# EAGLE board PCB1 v21 (EAGLE 9.7.0)

Size 58.4 x 25.07 mm. Coordinates in mm from the lower left corner, seen from the top.
Outline: 0,0 58.4,0 58.4,25.07 0,25.07 0,0
Copper layers (1*16): Top / Bottom
Stack-up Default Layer Stack: Top CuFoil:007 0.035mm / Dielectric-1 FR-4 0.2mm / Bottom CuFoil:007 0.035mm
Design rules: minimum copper width 6mil, minimum drill size 0.35mm, copper clearance wire_polygon to wire_polygon 6mil, copper clearance wire_polygon to pad_smd 6mil, copper clearance wire_polygon to via 6mil, copper clearance pad_smd to pad_smd 6mil, copper clearance pad_smd to via 6mil, copper clearance via to via 6mil, copper clearance smd to pad (same net) 6mil, copper clearance smd to via (same net) 6mil, copper clearance smd to smd (same net) 6mil, dimension clearance 40mil, via restrict clearance 0mil, restrict clearance 0mil, solder-mask clearance 0mil, drill distance 6mil, keepout clearance 0mil

## Footprints (pad centres in the part's own frame; a part is rotated, then mirrored left to right if it is on the bottom)
CAPC2012X110 = smd 1.165 x 1.465: 1 -0.875,0; 2 0.875,0
CAPAE430X610N = smd 2.6 x 1.8: 1 -2.25,0; 2 2.25,0
CAPPRD350W65D800H2000 = drill 0.85 pad 1.275 square: 1 0,0 | drill 0.85 pad 1.275: 2 3.5,0
LEDC1005X25N_FLAT-B = smd 0.7 x 0.5: A 0.45,0; C -0.45,0
VEMD2023X01 = smd 1.35 x 0.75: 1 -1.9,0; 2 1.9,0
SOD2513X115N = smd 1.05 x 0.5: 1 -1.138,0; 2 1.138,0
LC86LICMD = smd 2.5 x 1: 1 7.75,-6.35; 2 7.75,-3.81; 3 7.75,-1.27; 4 7.75,1.27; 5 7.75,3.81; 6 7.75,6.35; 7 -7.75,6.35; 8 -7.75,3.81; 9 -7.75,1.27; 10 -7.75,-1.27; 11 -7.75,-3.81; 12 -7.75,-6.35
SOP254P675X240-4N = smd 1.75 x 0.65: 1 -3.075,1.27; 2 -3.075,-1.27; 3 3.075,-1.27; 4 3.075,1.27
ACS1088SPTR = smd 0.9 x 2: 1 -2.3,-2.95; 2 2.3,-2.95 | smd 3.2 x 2: 3 0,2.95
HAL1503UAA = drill 0.76 pad 1.2: 1 0,0; 2 2.54,0; 3 5.08,0
2468 = drill 1.02 pad 1.53: 1 23.625,-6.35; 2 23.625,6.35 | hole 3.45: -14.985,2.35; 14.985,-2.35
1_05X2MM = drill 1.016 pad 1.3 square: 1 -4,0 | drill 1.016 pad 1.3: 2 -2,0; 3 0,0; 4 2,0; 5 4,0
1X04 = drill 1.016 long: 1 -3.81,0; 2 -1.27,0; 3 1.27,0; 4 3.81,0
1X01 = drill 1.016 octagon: 1 0,0
DMG1029SVQ7 = smd 0.3 x 0.67: 1 -0.5,-0.635; 2 0,-0.635; 3 0.5,-0.635; 4 0.5,0.635; 5 0,0.635; 6 -0.5,0.635
RESC2012X65 = smd 1.031 x 1.42: 1 -0.919,0; 2 0.919,0
THRMC2012X95N = smd 0.75 x 1.45: 1 -1.1,0; 2 1.1,0
E73-2G4M08S1C = smd 2 x 1: 1 -6.5,5.03; 2 -6.5,3.76; 3 -6.5,2.49; 4 -6.5,1.22; 5 -6.5,-0.05; 6 -6.5,-1.32; 7 -6.5,-2.59; 8 -6.5,-3.86; 9 -6.5,-5.13; 10 -6.5,-6.4; 26 6.5,-6.4; 27 6.5,-5.13; 29 6.5,-3.86; 31 6.5,-2.59; 33 6.5,-1.32; 35 6.5,-0.05; 37 6.5,1.22; 39 6.5,2.49; 41 6.5,3.76; 43 6.5,5.03 | smd 1 x 2: 11 -4.44,-9; 13 -3.17,-9; 15 -1.9,-9; 17 -0.63,-9; 19 0.64,-9; 21 1.91,-9; 23 3.18,-9; 25 4.45,-9 | smd 0.9 x 0.9: 12 -3.81,-6.9; 14 -2.54,-6.9; 16 -1.27,-6.9; 18 0,-6.9; 20 1.27,-6.9; 22 2.54,-6.9; 24 3.81,-6.9; 28 4.4,-4.495; 30 4.4,-3.225; 32 4.4,-1.955; 34 4.4,-0.685; 36 4.4,0.585; 38 4.4,1.855; 40 4.4,3.125; 42 4.4,4.395
FP-SX1726-MOD = smd 1.917 x 1.537: 1 -7.4,7; 2 -7.4,5; 3 -7.4,3; 4 -7.4,1; 5 -7.4,-1; 6 -7.4,-3; 7 -7.4,-5; 8 -7.4,-7; 9 7.4,-7; 10 7.4,-5; 11 7.4,-3; 12 7.4,-1; 13 7.4,1; 14 7.4,3; 15 7.4,5; 16 7.4,7
SOT230P700X170-4 = smd 1.86 x 0.898: 1 -3.075,2.3; 2 -3.075,0; 3 -3.075,-2.3 | smd 1.86 x 3.189: 4 3.075,0

## Placement (x,y rotation side)
C2  [CAPC2012X110]  14.81,19.03 180 bottom
C3  EEE-HP0J100R  [CAPAE430X610N]  2.79,12.49 90 top
C4  EEE-HP0J100R  [CAPAE430X610N]  2.78,20.5 90 top
C5  [CAPC2012X110]  15.88,6.4 270 top
C6  EEE-HP0J100R  [CAPAE430X610N]  51.35,22.45 180 top
C7  ADCR-S03R0SA305MB  [CAPPRD350W65D800H2000]  0.18,-36.09 0 top  (outside the outline)
D1  LED_BLUE  [LEDC1005X25N_FLAT-B]  40.28,4.61 90 top
D2  VEMD2023X01  [VEMD2023X01]  23.88,6.38 270 top
D3  CUS520,H3F  [SOD2513X115N]  2.13,-30.33 0 top  (outside the outline)
D4  CUS520,H3F  [SOD2513X115N]  -6.12,-41.86 0 top  (outside the outline)
IC1  LC86LICMD  [LC86LICMD]  14.46,16.53 180 top
IC2  VOT8024AM-T  [SOP254P675X240-4N]  10.67,19.74 270 bottom
IC3  ACS108-8SP-TR  [ACS1088SPTR]  12.6,9.76 0 bottom
IC4  HAL1503UA-A  [HAL1503UAA]  13.66,1.65 90 top
J1  2468  [2468]  31.72,12.7 0 top
JP1  PINHD-1X55X2MM  [1_05X2MM]  27.94,2.18 180 top
JP2  PINHD-1X4  [1X04]  30.56,6.43 180 top
JP3  PINHD-1X1  [1X01]  46.66,19.38 0 top
JP4  PINHD-1X1  [1X01]  43.82,19.38 0 top
JP5  PINHD-1X1  [1X01]  11.4,1.78 0 bottom
JP6  PINHD-1X1  [1X01]  9.07,1.78 0 bottom
JP7  PINHD-1X1  [1X01]  56.62,22.91 0 top
JP8  PINHD-1X1  [1X01]  2.49,-8.43 0 top  (outside the outline)
JP9  PINHD-1X1  [1X01]  2.84,-13.89 0 top  (outside the outline)
Q1  DMG1029SVQ-7  [DMG1029SVQ7]  52.43,18.97 90 top
Q4  DMG1029SVQ-7  [DMG1029SVQ7]  7.14,5.51 0 top
Q5  DMG1029SVQ-7  [DMG1029SVQ7]  20.95,5.34 0 top
R1  [RESC2012X65]  15.83,2.45 270 top
R2  100K  [RESC2012X65]  39.32,1.85 180 top
R3  200R  [RESC2012X65]  16.15,22.07 90 bottom
R4  [RESC2012X65]  2.55,5.92 0 top
R5  [RESC2012X65]  42.14,22.45 90 top
R6  [RESC2012X65]  13.74,22.02 90 bottom
R7  1k  [RESC2012X65]  37.66,4.62 180 top
R8  [RESC2012X65]  19.03,18.78 90 bottom
R9  [RESC2012X65]  19.13,11.42 270 bottom
R10  [RESC2012X65]  18.31,6.39 270 top
R11  [RESC2012X65]  2.55,1.73 0 top
R12  [RESC2012X65]  45.77,22.62 90 top
R13  [RESC2012X65]  18.25,2.45 270 top
R14  200k  [RESC2012X65]  2.13,-25.73 0 top  (outside the outline)
R15  100k  [RESC2012X65]  23.5,-7.44 0 top  (outside the outline)
RT1  NTCS0805E3104JXT  [THRMC2012X95N]  35.23,1.87 0 top
U1  E73-2G4M08S1C  [E73-2G4M08S1C]  33.03,18.52 0 top
U$1  SX1276S8S-UPDATED  [FP-SX1726-MOD]  49.62,9.37 90 top
VR1  NCP1117ST33T3G  [SOT230P700X170-4]  14.07,-9.42 0 top  (outside the outline)

## Library data of the parts
C2 C5 = Capacitor; CATEGORY: Capacitor
C3 C4 C6 = EEE-HP0J100R; DESCRIPTION: Aluminum Electrolytic Capacitors - SMD Al Lytic Cap 105C SMT BP-HB Series; HEIGHT: 6.1mm; MANUFACTURER_NAME: Panasonic; MANUFACTURER_PART_NUMBER: EEE-HP0J100R; MOUSER_PART_NUMBER: 667-EEE-HP0J100R; MOUSER_PRICE-STOCK: https://www.mouser.co.uk/ProductDetail/Panasonic/EEE-HP0J100R?qs=GoZnPdyRfjb6sZlAqWVWuQ%3D%3D
C7 = ADCR-S03R0SA305MB; DESCRIPTION: CAP 3F 3V TH; HEIGHT: 20mm; MANUFACTURER_NAME: ABRACON; MANUFACTURER_PART_NUMBER: ADCR-S03R0SA305MB; MOUSER_PART_NUMBER: 815-ADCRS03R0SA305MB; MOUSER_PRICE-STOCK: https://www.mouser.co.uk/ProductDetail/ABRACON/ADCR-S03R0SA305MB?qs=11PymoJGorJFz5koTqmlDw%3D%3D
D1 = LED; CATEGORY: LED; COLOR: BLUE; DESCRIPTION: CHIP LED FLAT; SUB-CATEGORY: CHIP; TYPE: FLAT_TOP
D2 = VEMD2023X01; DESCRIPTION: Photodiodes Gullwing 750-1050nm +/-35 deg; HEIGHT: 2.7mm; MANUFACTURER_NAME: Vishay; MANUFACTURER_PART_NUMBER: VEMD2023X01; MOUSER_PART_NUMBER: 78-VEMD2023X01; MOUSER_PRICE-STOCK: https://www.mouser.co.uk/ProductDetail/Vishay-Semiconductors/VEMD2023X01?qs=5csRq1wdUj7rHVLzT8%252Bxcw%3D%3D
D3 D4 = CUS520_H3F; DESCRIPTION: Schottky Diodes & Rectifiers Single Low Leakge; HEIGHT: 1.15mm; MANUFACTURER_NAME: Toshiba; MANUFACTURER_PART_NUMBER: CUS520,H3F; MOUSER_PART_NUMBER: 757-CUS520H3F; MOUSER_PRICE-STOCK: https://www.mouser.co.uk/ProductDetail/Toshiba/CUS520H3F?qs=cW4DzVrAanMh8DRQGiUcZw%3D%3D
IC1 = LC86LICMD; DESCRIPTION: Quectel Wireless Solutions; HEIGHT: 7.05mm; MANUFACTURER_NAME: Quectel; MANUFACTURER_PART_NUMBER: LC86LICMD; MOUSER_PART_NUMBER: 277-LC86LICMD; MOUSER_PRICE-STOCK: https://www.mouser.co.uk/ProductDetail/Quectel/LC86LICMD?qs=iLbezkQI%252BsiFPFQjIwBL1Q%3D%3D
IC2 = VOT8024AM-T; DESCRIPTION: Triac & SCR Output Optocouplers 800V Vrdm Phototriac SOP-4; UL, cUL; HEIGHT: 2.4mm; MANUFACTURER_NAME: Vishay; MANUFACTURER_PART_NUMBER: VOT8024AM-T; MOUSER_PART_NUMBER: 78-VOT8024AM-T; MOUSER_PRICE-STOCK: https://www.mouser.co.uk/ProductDetail/Vishay-Semiconductors/VOT8024AM-T?qs=byeeYqUIh0N%252Bs3wUufxnOA%3D%3D
IC3 = ACS108-8SP-TR; DESCRIPTION: Overvoltage protected AC Switch 0.8 A - 800 V in SOT223-2L high creepage package; HEIGHT: 1.8mm; MANUFACTURER_NAME: STMicroelectronics; MANUFACTURER_PART_NUMBER: ACS108-8SP-TR; MOUSER_PART_NUMBER: 511-ACS108-8SP-TR; MOUSER_PRICE-STOCK: https://www.mouser.co.uk/ProductDetail/STMicroelectronics/ACS108-8SP-TR?qs=pBunHO6%252BwtF6H7n0e1joeA%3D%3D
IC4 = HAL1503UA-A; DESCRIPTION: Board Mount Hall Effect / Magnetic Sensors; HEIGHT: 4.4mm; MANUFACTURER_NAME: TDK; MANUFACTURER_PART_NUMBER: HAL1503UA-A; MOUSER_PART_NUMBER: 586-HAL1503UA-A; MOUSER_PRICE-STOCK: https://www.mouser.co.uk/ProductDetail/TDK-Micronas/HAL1503UA-A?qs=u%2FaXZZupywzQZMZFxYZolA%3D%3D
J1 = 2468; DESCRIPTION: Cylindrical Battery Contacts, Clips, Holders & Springs 2AAA PC MNT HOLDER; HEIGHT: mm; MANUFACTURER_NAME: Keystone Electronics; MANUFACTURER_PART_NUMBER: 2468; MOUSER_PART_NUMBER: 534-2468; MOUSER_PRICE-STOCK: https://www.mouser.co.uk/ProductDetail/Keystone-Electronics/2468?qs=3CbvriavsLAoISGi3MywrQ%3D%3D
JP1 = Connector; CATEGORY: Headers; DESCRIPTION: Header, Straight, 5 Position; MANUFACTURER: Generic; MPN: Generic; OPERATING_TEMPERATURE: Generic; PART_STATUS: Active; PITCH: 0.079" (2.00mm); ROHS_COMPLIANCE: Generic; SERIES: Generic; SUB-CATEGORY: Headers, Male Pins; TYPE: Board to Board or Cable, Unshrouded, Through Hole, Straight
JP2 = Connector; CATEGORY: Headers; DESCRIPTION: Header, Straight, 4 Position; MANUFACTURER: Generic; MPN: Generic; OPERATING_TEMPERATURE: Generic; PART_STATUS: Active; PITCH: 0.100" (2.54mm); ROHS_COMPLIANCE: Generic; SERIES: Generic; SUB-CATEGORY: Headers, Male Pins; TYPE: Board to Board or Cable, Unshrouded, Through Hole, Straight
JP3-JP9 = Connector; CATEGORY: Headers; DESCRIPTION: Header, Straight, 1 Position; MANUFACTURER: Generic; MPN: Generic; OPERATING_TEMPERATURE: Generic; PART_STATUS: Active; PITCH: 0.100" (2.54mm); ROHS_COMPLIANCE: Generic; SERIES: Generic; SUB-CATEGORY: Headers, Male Pins; TYPE: Board to Board or Cable, Unshrouded, Through Hole, Straight
Q1 Q4 Q5 = DMG1029SVQ-7; DESCRIPTION: Mosfet Array 60V 500mA (Ta), 360mA (Ta) 450mW (Ta) Surface Mount SOT-563; HEIGHT: 0.6mm; MANUFACTURER_NAME: Diodes Incorporated; MANUFACTURER_PART_NUMBER: DMG1029SVQ-7; MOUSER_PART_NUMBER: 621-DMG1029SVQ-7; MOUSER_PRICE-STOCK: https://www.mouser.co.uk/ProductDetail/Diodes-Incorporated/DMG1029SVQ-7?qs=u16ybLDytRbBaAc3KwCTwA%3D%3D
R1-R15 = Tutorial - Fusion 360; CATEGORY: Resistor; SUB-CATEGORY: Fixed
RT1 = NTCS0805E3104JXT; DESCRIPTION: NTC Thermistors 100Kohms 5% SMD; HEIGHT: 0.95mm; MANUFACTURER_NAME: Vishay; MANUFACTURER_PART_NUMBER: NTCS0805E3104JXT; MOUSER_PART_NUMBER: 594-NTCS0805E3104JXT; MOUSER_PRICE-STOCK: https://www.mouser.co.uk/ProductDetail/Vishay-BC-Components/NTCS0805E3104JXT?qs=Y0gyZw6qHXedwsSst0X8tA%3D%3D
U1 = E73-2G4M08S1C; AVAILABILITY: Not in stock; CHECK_PRICES: https://www.snapeda.com/parts/E73-2G4M08S1C/EBYTE/view-part/?ref=eda; DESCRIPTION: E73 series are wireless Bluetooth modules designed by Chengdu Ebyte which feature small size, low power consumption, built-in PCB antenna and IPX interface; MF: EBYTE; MP: E73-2G4M08S1C; PACKAGE: Package; PRICE: None; SNAPEDA_LINK: https://www.snapeda.com/parts/E73-2G4M08S1C/EBYTE/view-part/?ref=snap
U$1 = Library
VR1 = IC_Power-Management; CATEGORY: IC_Power-Management; MANUFACTURER: ON Semiconductor; MPN: NCP1117ST33T3G; OPERATING_TEMP: 0 to +125 °C; PART_STATUS: Active; ROHS_COMPLIANT: RoHS3 Compliant; SERIES: NCP1117, NCV1117; SUB-CATEGORY: Voltage Regulator; TYPE: Linear

## Nets
DIO0: U1.36 U$1.15
DIO1: U1.38 U$1.14
DIO2: U1.40 U$1.16
FORCE_GPS: IC1.7 U1.42
GND: C3.2 C4.2 C5.2 C6.2 C7.2 D1.C IC1.3 IC1.12 IC2.2 IC4.2 J1.2 JP1.1 JP9.1 Q1.1 Q4.1 Q5.1 R2.1 R15.2 U$1.1 U$1.8 U$1.10 VR1.1
GPS_ANT_OK: IC1.8 U1.11
GPSPWR: R4.2 U1.16
LORAPWR: R5.2 U1.41
MISO: U1.35 U$1.3
MOSI: U1.43 U$1.2
N$1: Q1.3 U$1.13
N$2: Q1.2 R5.1
N$3: Q4.5 Q4.6 R11.1
N$4: IC1.4 Q4.3
N$5: R2.2 RT1.1 U1.4
N$6: JP1.5 U1.26
N$7: D1.A R7.1
N$8: JP1.4 U1.37
N$9: JP1.3 U1.39
N$10: JP2.1 U1.7
N$11: JP2.2 U1.3
N$12: JP2.3 U1.18
N$13: JP2.4 U1.15
N$14: JP3.1 U1.20
N$15: JP4.1 U1.33
N$16: IC2.1 R3.1
N$17: D2.2 U1.8
N$18: R3.2 U1.28
N$19: R7.2 U1.30
N$20: RT1.2 U1.32
N$21: C2.1 R6.1 R8.2
N$22: IC2.4 IC3.2 R9.1
N$23: C2.2 IC3.3 JP6.1 R9.2
N$24: IC3.1 JP5.1 R8.1
N$25: IC2.3 R6.2
N$26: C5.1 IC4.1 Q5.3 R10.1
N$27: Q5.2 R1.1
N$28: IC4.3 R10.2 U1.10
N$29: R1.2 U1.34
N$30: Q4.2 R4.1
N$31: Q1.5 Q1.6 R12.1
N$32: Q5.5 Q5.6 R13.1
N$33: R14.2 R15.1 U1.9
N$34: U1.5 U1.21 U1.24
N$35: D3.2 J1.1
N$36: JP8.1 R14.1 VR1.3
N$37: JP7.1 U$1.9
N$38: D4.2 VR1.2
NSS: U1.2 U$1.5
RESET_GPS: IC1.10 U1.17
RST: U1.13 U$1.6
RXD: IC1.1 U1.22
SCK: U1.12 U$1.4
TXD: IC1.2 U1.14
VCC: C3.1 C4.1 C6.1 C7.1 D2.1 D3.1 D4.1 IC1.5 JP1.2 Q1.4 Q4.4 Q5.4 R11.2 R12.2 R13.2 U1.19

## Tracks (layer width: path | path; a pad name or v marks a point on that pad's centre or on a via)
DIO0  (1 unrouted)
DIO1  (1 unrouted)
DIO2  (1 unrouted)
FORCE_GPS  (1 unrouted)
GND  (21 unrouted)
GPS_ANT_OK  (1 unrouted)
GPSPWR  (1 unrouted)
LORAPWR  (1 unrouted)
MISO  (1 unrouted)
MOSI  (1 unrouted)
N$1  (1 unrouted)
N$2  (1 unrouted)
N$3  (2 unrouted)
N$4  (1 unrouted)
N$5  (2 unrouted)
N$6  (1 unrouted)
N$7  (1 unrouted)
N$8  (1 unrouted)
N$9  (1 unrouted)
N$10  (1 unrouted)
N$11  (1 unrouted)
N$12  (1 unrouted)
N$13  (1 unrouted)
N$14  (1 unrouted)
N$15  (1 unrouted)
N$16  (1 unrouted)
N$17  (1 unrouted)
N$18  (1 unrouted)
N$19  (1 unrouted)
N$20  (1 unrouted)
N$21  (2 unrouted)
N$22  (2 unrouted)
N$23  (3 unrouted)
N$24  (2 unrouted)
N$25  (1 unrouted)
N$26  (3 unrouted)
N$27  (1 unrouted)
N$28  (2 unrouted)
N$29  (1 unrouted)
N$30  (1 unrouted)
N$31  (2 unrouted)
N$32  (2 unrouted)
N$33  (2 unrouted)
N$34  (2 unrouted)
N$35  (1 unrouted)
N$36  (2 unrouted)
N$37  (1 unrouted)
N$38  (1 unrouted)
NSS  (1 unrouted)
RESET_GPS  (1 unrouted)
RST  (1 unrouted)
RXD  (1 unrouted)
SCK  (1 unrouted)
TXD  (1 unrouted)
VCC  (15 unrouted)